# Altium PCB FRAM.PcbDoc
Units mm, origin at the board's own origin, x right, y up, seen from the top; angles counter-clockwise.
Board outline 26.7 x 21.1 mm, 2 copper layers (Top Layer, Bottom Layer), stack 1.466 mm thick; 4 components, 7 nets, 18 pads, 1 vias.
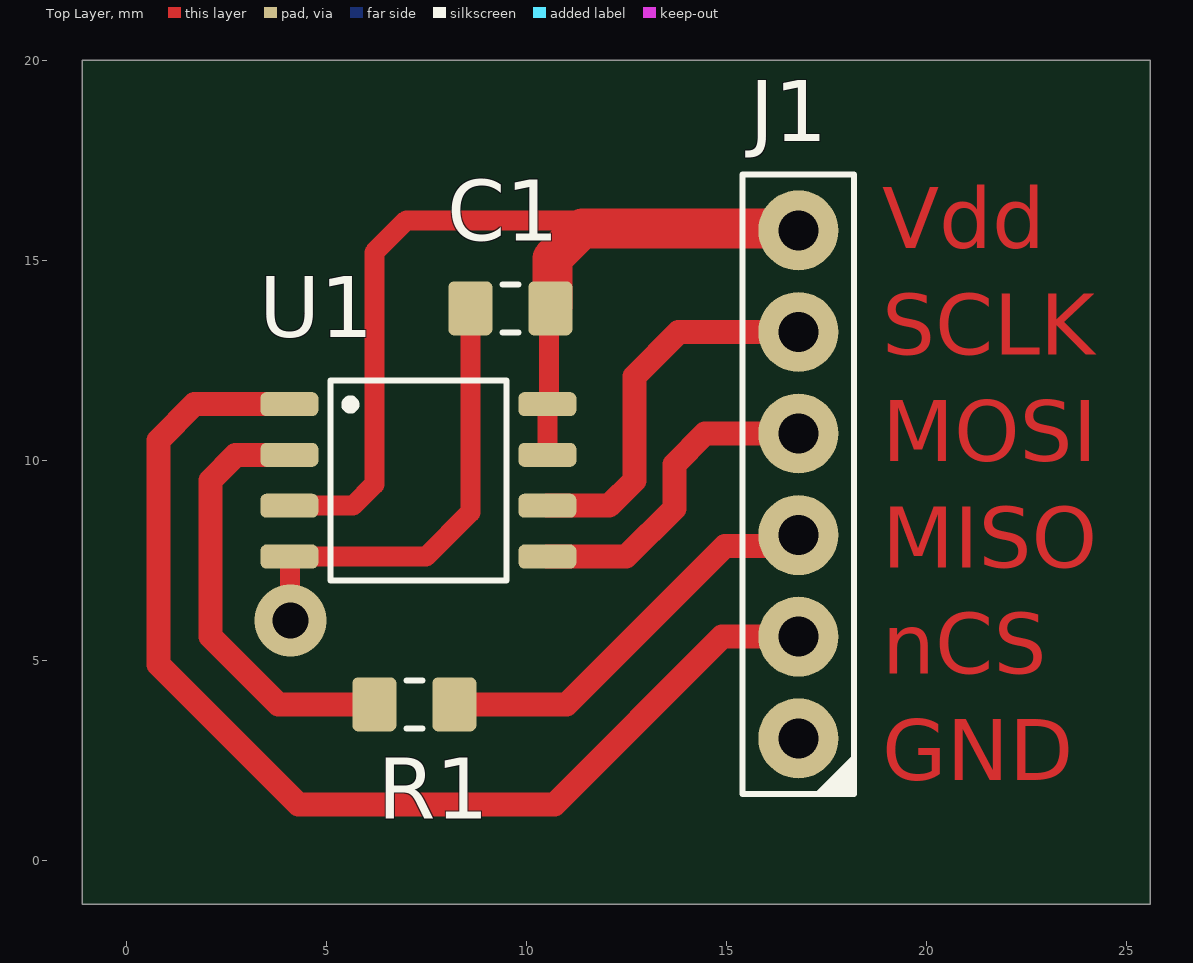
[diagram p0: Top Layer view]
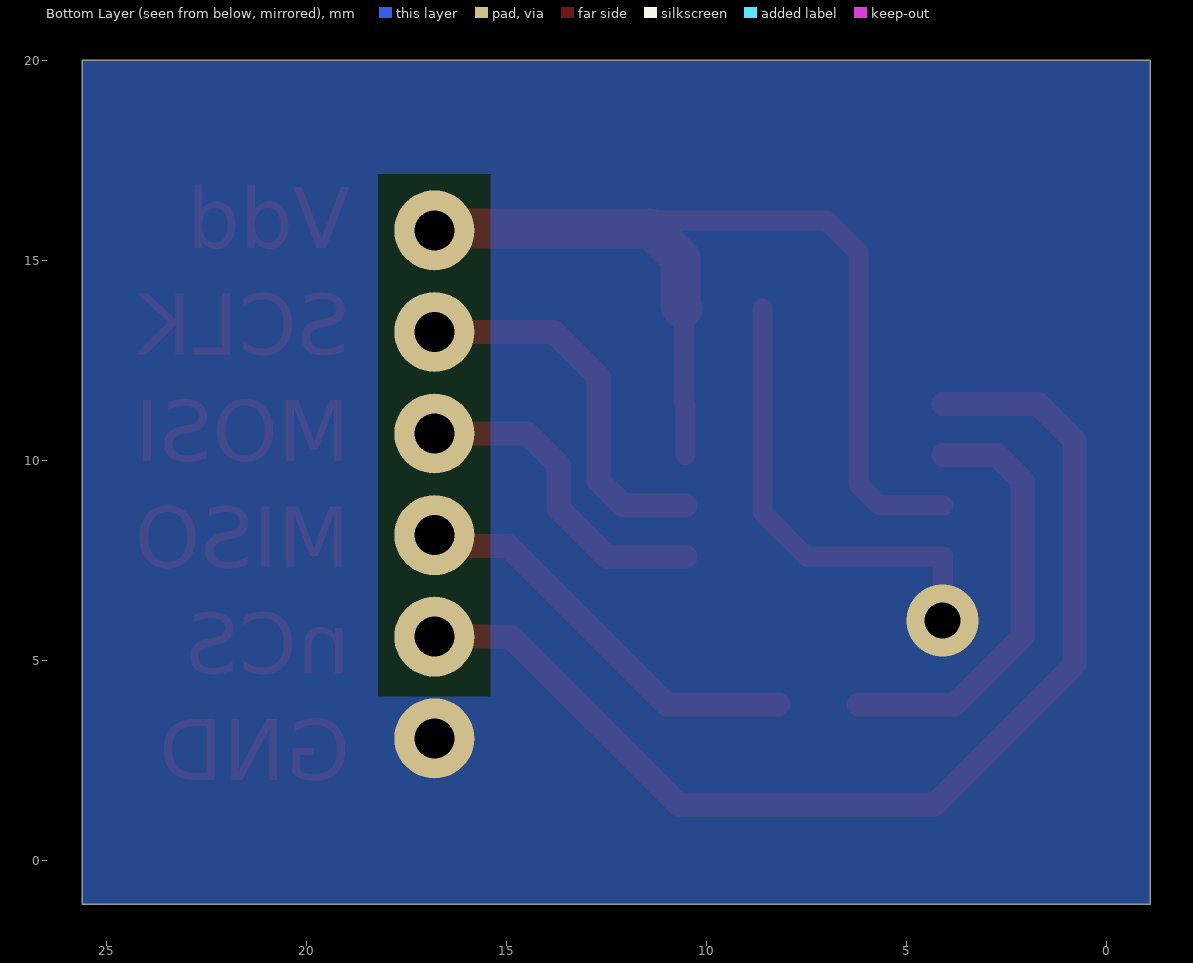
[diagram p1: Bottom Layer view, seen from below]

## Layer stack, top to bottom
Top Solder: solder mask 0.01, Solder Resist, Dk 3.5
Top Layer: signal copper 0.018
Dielectric 1: prepreg 0.36, PP-006, Dk 4.1
Dielectric 2: prepreg 0.71, PP-006, Dk 4.1
Dielectric1: core 0.36, FR-4, Dk 4.8
Bottom Layer: signal copper 0.018
Bottom Solder: solder mask 0.01, Solder Resist, Dk 3.5

## Board outline
-1.1,-1.1 25.6,-1.1 25.6,20 -1.1,20

## Design rules (kind name [scope] priority, off if disabled: settings)
AssemblyTestPointUsage [All] p1 off:
AssemblyTestpoint [All] p1 off: testpointundercomponent=TRUE minsize=1.016 maxsize=2.54 preferedsize=1.524 minholesize=0 maxholesize=1.016 preferedholesize=0.813 testpointgrid=0.025 usegrid=TRUE gridtolerance=0 allowsidetop=TRUE allowsidebottom=TRUE
BoardOutlineClearance [All] p1 off: gap=0.25 ignorepadtopadclearanceinfootprint=FALSE except(0: Arc-SplitContinuation Track-SplitContinuation SMDPad-SplitContinuation THPad-SplitContinuation Via-SplitContinuation Fill-SplitContinuation Poly-SplitContinuation Region-SplitContinuation Text-SplitContinuation)
Clearance [All] p1: gap=0.4 ignorepadtopadclearanceinfootprint=FALSE
ComponentClearance [All] p1 off: gap=0.25 collisioncheckmode=3 verticalgap=0 showdistances=FALSE
DiffPairsRouting [All] p1 off: maxlimit=0.25 minlimit=0.25 mostfreqgap=0.25 toplayer_minwidth=0.381 toplayer_maxwidth=0.381 toplayer_prefwidth=0.381 bottomlayer_minwidth=0.381 bottomlayer_maxwidth=0.381 bottomlayer_prefwidth=0.381 maxuncoupledlength=12.5
FabricationTestPointUsage [All] p1 off: valid=0 allowmultiple=FALSE
FabricationTestpoint [All] p1 off: side=3 testpointundercomponent=TRUE minsize=1.016 maxsize=2.54 preferedsize=1.524 minholesize=0 maxholesize=1.016 preferedholesize=0.813 testpointgrid=0.025 allowsidetop=TRUE allowsidebottom=TRUE usegrid=TRUE gridtolerance=0
FanoutControl Fanout_BGA [IsBGA] p1 off: bgadir=Out bgaviamode=Centered fanoutstyle=Auto fanoutdirection=Alternating viagrid=0.025 // Fanout_BGA (Default Rule)
FanoutControl Fanout_LCC [IsLCC] p2 off: bgadir=Out bgaviamode=Centered fanoutstyle=Auto fanoutdirection=Alternating viagrid=0.025 // Fanout_LCC (Default Rule)
FanoutControl Fanout_SOIC [IsSOIC] p3 off: bgadir=Out bgaviamode=Centered fanoutstyle=Auto fanoutdirection=Alternating viagrid=0.025 // Fanout_SOIC (Default Rule)
FanoutControl Fanout_Small [(CompPinCount < 5)] p4 off: bgadir=Out bgaviamode=Centered fanoutstyle=Auto fanoutdirection=OutThenIn viagrid=0.025 // Fanout_Small (Default Rule)
FanoutControl Fanout_Default [All] p5 off: bgadir=Out bgaviamode=Centered fanoutstyle=Auto fanoutdirection=Alternating viagrid=0.025 // Fanout_Default (Default Rule)
Height [All] p1 off: minheight=0 maxheight=500 prefheight=12.5
HoleSize HoleSize-PTH [All] p1: absolutevalues=TRUE maxlimit=10 minlimit=0.15 maxpercent=80.000 minpercent=20.000
HoleToHoleClearance [All] p1 off: gap=0.35 allowstackedmicrovias=TRUE
LayerPairs [All] p1 off: enforce=TRUE
MinimumAnnularRing "Minimum IAR  >0.45mm" [((ObjectKind = 'Pad') OR (ObjectKind = 'Via')) And (Layer = 'MultiLayer') And (HoleDiameter > AsMM(0.45))] p1 off: minimumring=0.175 // minimum inner annular ring for pads > 0.45mm finished hole size
MinimumAnnularRing "Minimum IAR <=0.45mm" [((ObjectKind = 'Pad') OR (ObjectKind = 'Via')) And (Layer = 'MultiLayer') And (HoleDiameter <= AsMM(0.45))] p2 off: minimumring=0.1 // minimum inner annular ring for pads <= 0.45mm finished hole size
MinimumSolderMaskSliver [All] p1 off: minsoldermaskwidth=0.08
NetAntennae [All] p1 off: netantennaetolerance=0
PasteMaskExpansion [All] p1 off: expansion=0
PlaneClearance PlaneClearance-IPI [All] p1: clearance=0.25
PlaneConnect [All] p1: planeconnectstyle=Direct reliefexpansion=0.175 reliefentries=4 reliefconductorwidth=0.2 reliefairgap=0.2
PolygonConnect PolygonConnect-xTW [All] p1: connectstyle=Direct reliefconductorwidth=0.5 reliefentries=4 polygonreliefangle="90 Angle" airgapwidth=0.5
RoutingCorners [All] p1 off: cornerstyle=45-Degree minsetback=2.5 maxsetback=2.5
RoutingLayers [All] p1 off: top layer_v5=TRUE bottom layer_v5=TRUE
RoutingPriority [All] p1 off: routingpriority=0
RoutingTopology [All] p1 off: topology=Shortest
RoutingVias [All] p1: holewidth=0.25 width=0.8 viastyle="Through Hole" minholewidth=0.15 minwidth=0.5 maxholewidth=0.45 maxwidth=0.8 useviatemplates=TRUE viatemplateguid#1={B5015574-1706-43D0-909C-7C5F51C7AC2F} viatemplatename#1=v50h15m0mx0 // finishet hole size <= 0.45mm
SilkToSilkClearance [All] p1 off: silktosilkclearance=0.2
SilkToSolderMaskClearance SilkscreenOverComponentPads [IsPad] p1 off: minsilkscreentomaskgap=0.2 clearancetoexposedcopper=TRUE
SolderMaskExpansion [All] p1 off: expansion=0 istentingtop=FALSE
UnRoutedNet [All] p1: checkbadconnections=TRUE
Width Width-xTW [All] p1: maxlimit=2 minlimit=0.5 preferedwidth=0.5
3 further rules are at their usual default settings.

## Components (designator, comment, footprint, x,y, rotation, side; value= is the part's Value field where it differs from the comment)
C1 "100n" "CAPACITOR 2012 REFLOW" 9.6,13.8 r0 top
J1 "Socket1x6" "Socket1x6 P2.54" 16.8,9.4 r90 top
R1 "100" "RESISTOR 2012 REFLOW" 7.2,3.9 r0 top
U1 "865-MB85RS4MTYPF-G-BCE1-ND" "SO8W P1.27 C5.0X5.0 H2.0" 7.3,9.5 r0 top

## Footprints (in the part's own frame and the unit in brackets; to place one, negate y for a bottom-side part, rotate by r counter-clockwise, add the part's x,y. Pads: shape width x height; smd on the part's side, far side on the other; paste and mask are expansions set on the pad)
"CAPACITOR 2012 REFLOW" [mm] "Capacitor SMD 2.0x1.2mm (0805-imperial)"
  rrect25% 1.1x1.35 smd: 1(-1,0) 2(1,0)
  silkscreen extent -0.2,-0.6 0.2,0.6, body extent -1,-0.6 1,0.6, height 1
"RESISTOR 2012 REFLOW" [mm] "Resistor SMD 2.0x1.2mm (0805-imperial)"
  rrect25% 1.1x1.35 smd: 1(-1,0) 2(1,0)
  silkscreen extent -0.2,-0.6 0.2,0.6, body extent -1,-0.63 1,0.63, height 0.45
"SO8W P1.27 C5.0X5.0 H2.0" [mm] "8-Pin Small Outline Integrated Circuit 1.27 mm Pitch, IPC Medium Density"
  rrect50% 1.45x0.6 smd: 1(-3.225,1.905) 2(-3.225,0.635) 3(-3.225,-0.635) 4(-3.225,-1.905) 5(3.225,-1.905) 6(3.225,-0.635) 7(3.225,0.635) 8(3.225,1.905)
  silkscreen extent -2.2,-2.5 2.2,2.5, body extent -2.5,-2.5 2.5,2.5, height 1.76
"Socket1x6 P2.54" [mm] "Receptacle connector"
  round 2 hole 1: 1(-6.35,0) 2(-3.81,0) 3(-1.27,0) 4(1.27,0) 5(3.81,0) 6(6.35,0)
  silkscreen extent -7.75,-1.4 7.75,1.4, body extent -7.62,-1.27 7.62,1.27, height 7.01

## Part data
C1: library part Capacitor, "Capacitor"
J1: "Receptacle connector"
R1: library part Resistor, "Resistor"
U1: library part FM25V20A-G, "2-Mbit (256 K × 8) Serial (SPI) F-RAM"

## Via types
v1: diameter 1.8, hole 0.9, Top Layer to Bottom Layer, 1 vias

## Nets (pads, with @x,y where several pads share a name; then routed paths per layer and width w, separated by ;. In a path a pad name is that pad's centre, name@x,y a point inside that pad or via, vN(x,y) a via of type N, cw(c..) or ccw(c..) an arc to the next point about the centre after c; other vN are vias at no path point)
+3v3: C1.2 J1.6 U1.3 U1.7 U1.8 | length 25.2
  Top Layer w0.5: U1.3 5.665,8.865 6.2,9.4 6.2,15.2 7,16 11.2,16 11.4,15.8 ; U1.7 U1.8 10.563,11.442 10.563,13.762 C1.2
  Top Layer w1: C1.2 10.65,13.85 10.65,15.05 11.4,15.8 16.75,15.8 J1.6
GND: C1.1 J1.1 U1.4 | length 11.7
  Top Layer w0.5: v1(4.1,6) 4.088,6.013 4.088,7.582 U1.4 7.495,7.595 8.6,8.7 C1.1
MISO: J1.3 R1.2 | length 10.4
  Top Layer w0.6: R1.2 11,3.9 14.962,7.862 16.532,7.862 J1.3
MOSI: J1.4 U1.5 | length 8.2
  Top Layer w0.6: U1.5 12.495,7.595 13.7,8.8 13.7,9.9 14.47,10.67 J1.4
nCS: J1.2 U1.1 | length 28.4
  Top Layer w0.6: U1.1 1.705,11.405 0.8,10.5 0.8,4.9 4.3,1.4 10.7,1.4 14.89,5.59 J1.2
NetR1_1: R1.1 U1.2 | length 10.9
  Top Layer w0.6: U1.2 2.735,10.135 2.1,9.5 2.1,5.6 3.8,3.9 R1.1
SCLK: J1.5 U1.6 | length 9.6
  Top Layer w0.6: U1.6 12.065,8.865 12.7,9.5 12.7,12.1 13.81,13.21 J1.5

## Polygon pours and split planes (outlines as drawn)
GND on Bottom Layer "GND_L02_P000" (solid, pour order 0): -1.1,20 25.6,20 25.6,-1.1 -1.1,-1.1

## Other copper
Top Layer:
  text "Vdd" at 18.9,15.3 h1.52
  text "SCLK" at 18.9,12.64 h1.52
  text "MOSI" at 18.9,9.98 h1.52
  text "MISO" at 18.9,7.32 h1.52
  text "nCS" at 18.9,4.66 h1.52
  text "GND" at 18.9,2 h1.52
Bottom Layer:
  pour cut-out: 15.403,17.147 18.197,17.147 18.2,17.144 18.2,4.1 15.4,4.1

## Silkscreen, mask and mechanical layers (free items; w line width, h text height)
Mechanical 1:
  the board outline again, w0.254